# Altium PCB PCB1.PcbDoc
Units mil, origin at the board's own origin, x right, y up, seen from the top; angles counter-clockwise.
Board outline 2755.91 x 2854.33 mil, 2 copper layers (Top Layer, Bottom Layer); 77 components, 54 nets, 230 pads, 47 vias.
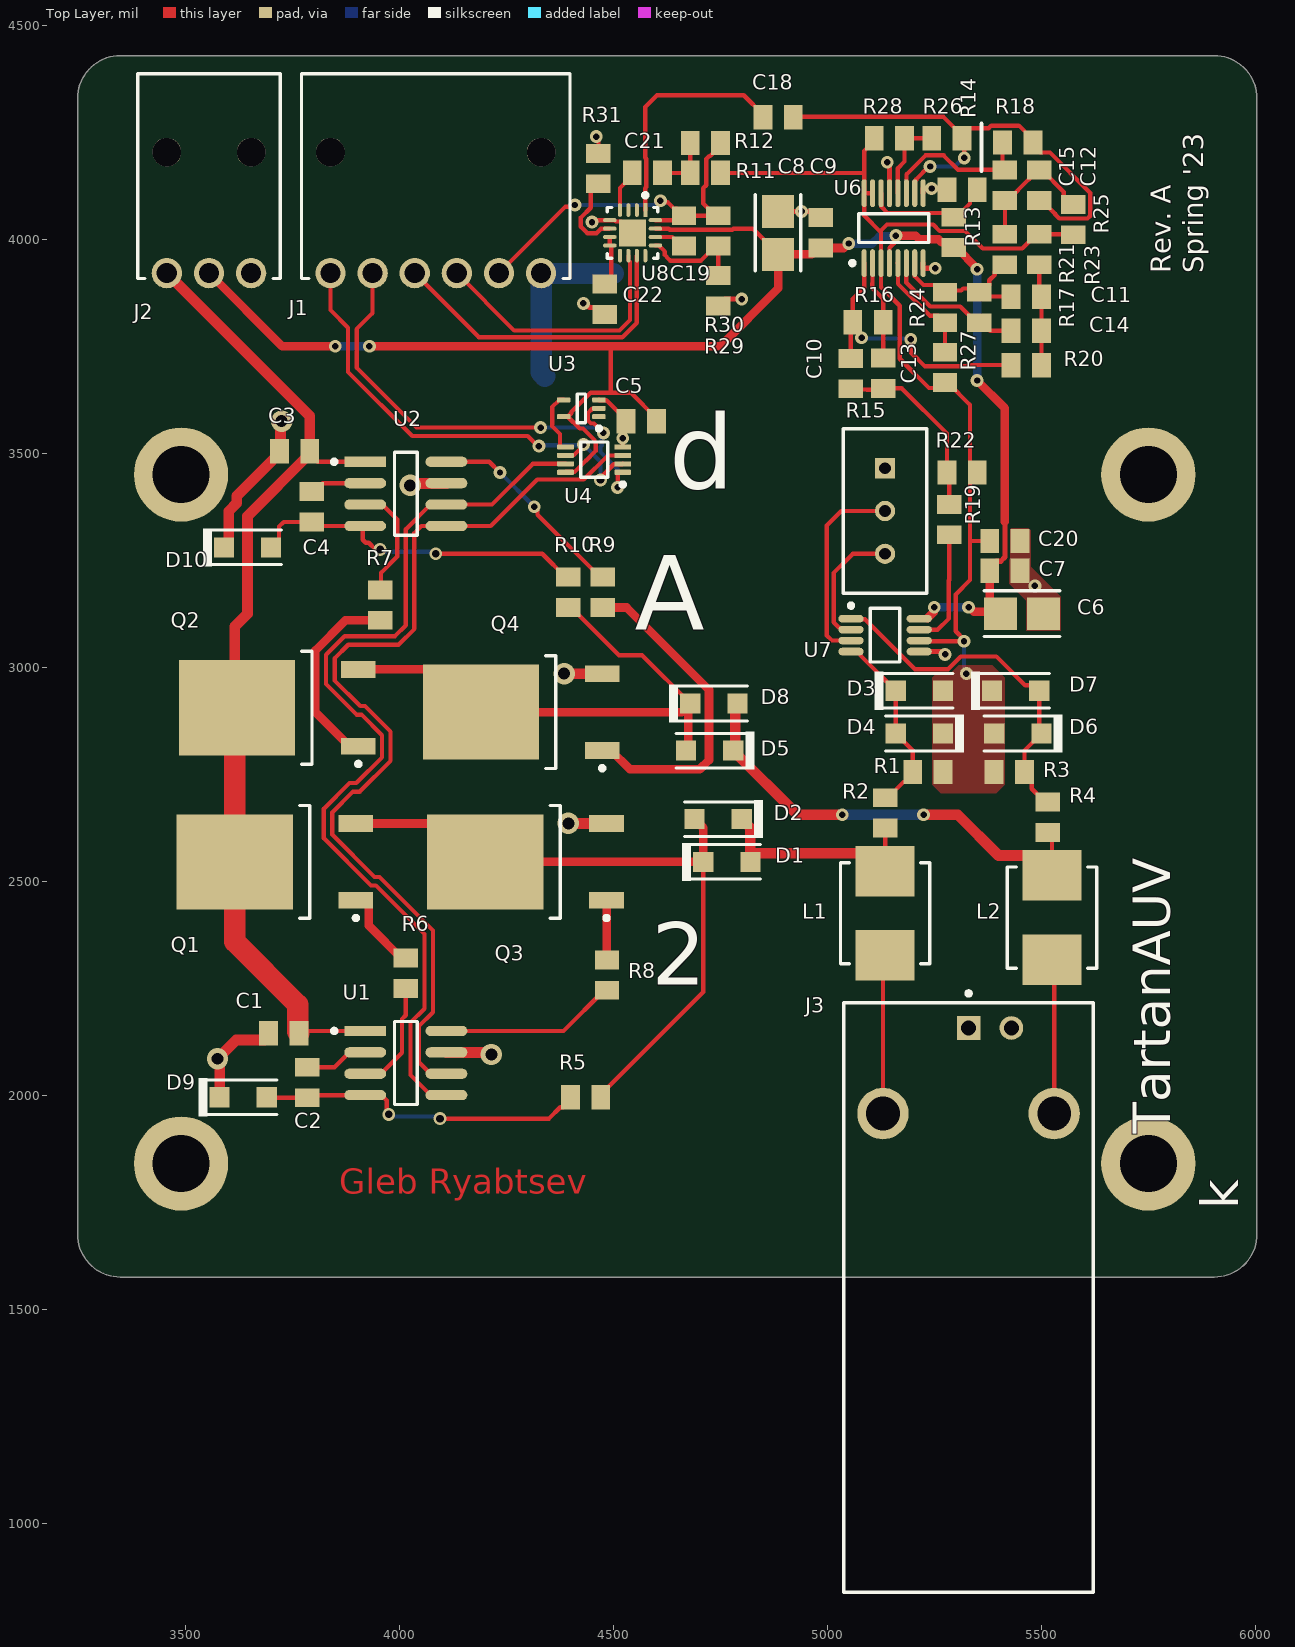
[diagram p0: Top Layer view]
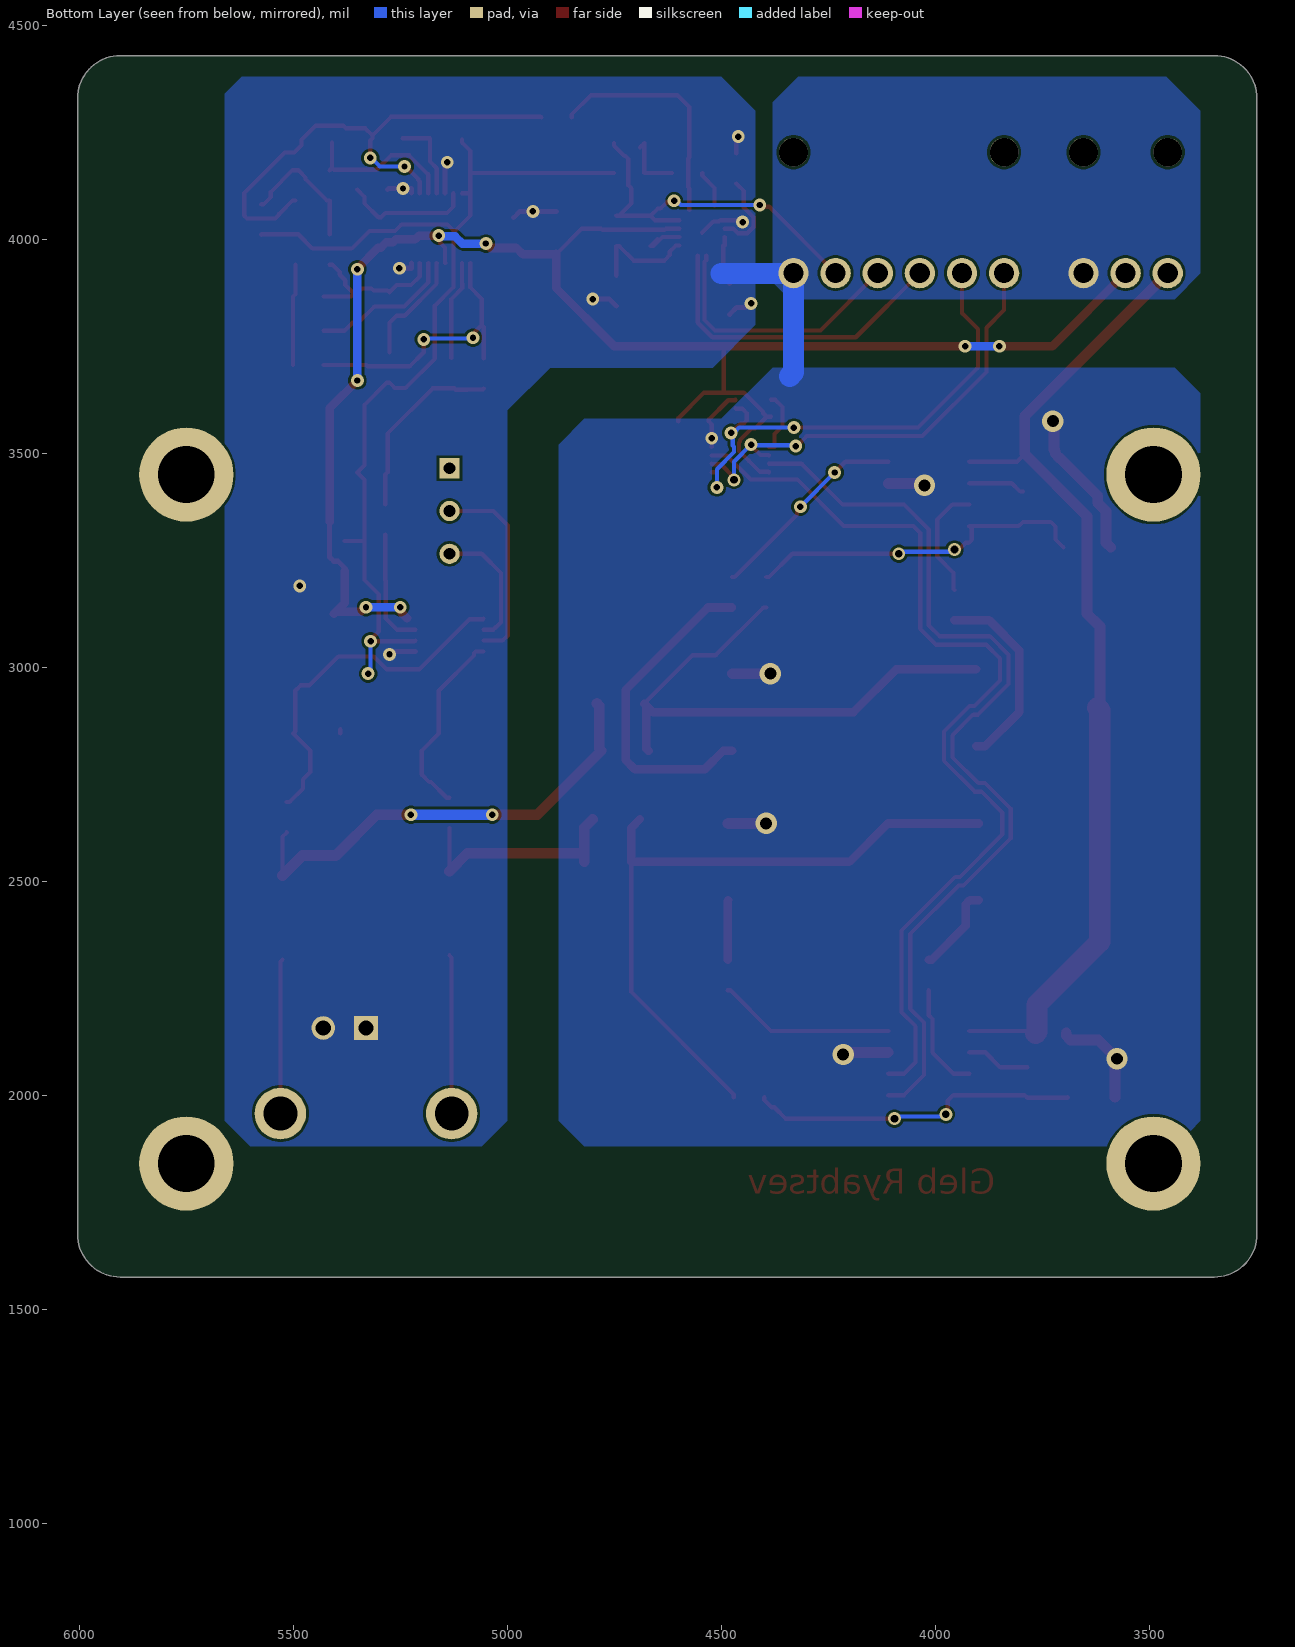
[diagram p1: Bottom Layer view, seen from below]

## Layer stack, top to bottom
Top Solder: solder mask 0.4, Solder Resist, Dk 3.5
Top Layer: signal copper 1.4
Dielectric 1: dielectric 12.6, FR-4, Dk 4.8
Bottom Layer: signal copper 1.4
Bottom Solder: solder mask 0.4, Solder Resist, Dk 3.5

## Board outline
3248.03,1674.8 ccw(c3348.03,1674.8) 3348.03,1574.8 5903.94,1574.8 ccw(c5903.94,1674.8) 6003.94,1674.8 6003.94,4329.13 ccw(c5903.94,4329.13) 5903.94,4429.13 3348.03,4429.13 ccw(c3348.03,4329.13) 3248.03,4329.13

## Design rules (kind name [scope] priority, off if disabled: settings)
Clearance [All] p1: gap=6 ignorepadtopadclearanceinfootprint=TRUE except(0: Arc-Text Arc-Hole Track-Text Track-Hole SMDPad-Text SMDPad-Hole THPad-Text THPad-Hole Via-Text Via-Hole Fill-Text Fill-Hole Poly-Text Poly-Hole Region-Text Region-Hole Text-Text Text-Hole; 5: Arc-Arc Arc-Track Arc-SMDPad Track-Track Track-SMDPad SMDPad-SMDPad)
HoleSize [All] p1: absolutevalues=TRUE maxlimit=244.09 minlimit=7.87 maxpercent=80.000 minpercent=20.000
MinimumAnnularRing [All] p1: minimumring=6
MinimumSolderMaskSliver [All] p1: minsoldermaskwidth=2.95
PolygonConnect [All] p1: connectstyle=Direct reliefconductorwidth=10 reliefentries=4 polygonreliefangle="90 Angle" airgapwidth=10
RoomDefinition Main [InComponentClass('Main')] p1: confinementstyle=ConfineIn formatcopy=TRUE lockcomponents=FALSE outline 1000,630 7090,630 7090,5020 1000,5020
RoomDefinition U_Tx [InComponentClass('U_Tx')] p2: confinementstyle=ConfineIn formatcopy=TRUE lockcomponents=FALSE outline 2230,620 7370,620 7370,4680 2230,4680
RoomDefinition U_Rx [InComponentClass('U_Rx')] p3: confinementstyle=ConfineIn formatcopy=TRUE lockcomponents=FALSE outline 1190,400 7600,400 7600,4620 1190,4620
RoutingVias [All] p1: holewidth=15 width=25 viastyle="Through Hole" minholewidth=12 minwidth=20 maxholewidth=28 maxwidth=50
SilkToSilkClearance [All] p1: silktosilkclearance=5
SilkToSolderMaskClearance [IsPad] p1: minsilkscreentomaskgap=5 clearancetoexposedcopper=TRUE
SolderMaskExpansion [All] p1: expansion=4 istentingtop=FALSE
Width [All] p1: maxlimit=50 minlimit=6 preferedwidth=10
26 further rules are at their usual default settings.

## Classes and differential pairs
component class U_Tx: C1 C2 C3 C4 C5 D9 D10 Q1 Q2 Q3 Q4 R5 R6 R7 R8 R9 R10 U1 U2 U3 U4
component class U_Rx: C6 C7 C8 C9 C10 C11 C12 C13 C14 C15 C18 C19 C20 C21 C22 R11 R12 R13 R14 R15 R16 R17 R18 R19 R20 R21 R22 R23 R24 R25 R26 R27 R28 R29 R30 R31 U6 U7 U8
component class Main: D1 D2 D3 D4 D5 D6 D7 D8 J1 J2 J3 L1 L2 R1 R2 R3 R4

## Components (designator, comment, footprint, x,y, rotation, side; value= is the part's Value field where it differs from the comment)
C1 "Capacitor" 0805 3729.5,2145 r0 top value=1u
C2 "Capacitor" 0805 3785,2029.5 r90 top value=1u
C3 "Capacitor" 0805 3755,3505 r0 top value=1u
C4 "Capacitor" 0805 3795,3375 r90 top value=1u
C5 "Capacitor" 0805 4565,3575 r0 top value=1u
C6 "C3216X5R1H106K160AB" FP-C3216-160-0_2-IPC_A 5455,3125 r0 top
C7 "Capacitor" 0805 5415,3225 r180 top value=0.1u
C8 "C3216X5R1H106K160AB" FP-C3216-160-0_2-IPC_A 4885,4015 r90 top
C9 "Capacitor" 0805 4985,4015 r270 top value=0.1u
C10 "Capacitor" 0805 5055,3686 r270 top value=330pF
C11 "Capacitor" 0805 5465,3866 r0 top value=300p
C12 "Capacitor" 0805 5495,4126 r90 top value=360p
C13 "Capacitor" 0805 5130.5,3687 r270 top value=330pF
C14 "Capacitor" 0805 5465,3786 r0 top value=300p
C15 "Capacitor" 0805 5415,4126 r270 top value=360p
C18 "Capacitor" 0805 4885,4285 r0 top value=19.6n
C19 "Capacitor" 0805 4665,4019.5 r90 top value=19.6n
C20 "Capacitor" 0805 5415,3295 r180 top value=0.1u
C21 "Capacitor" 0805 4579.5,4155 r0 top value=100n
C22 "Capacitor" 0805 4480,3860 r90 top value=100n
D1 "Diode" SOD-123F 4765,2545 r0 top
D2 "Diode" SOD-123F 4745,2645 r180 top
D3 "Diode" SOD-123F 5215,2945 r0 top
D4 "Diode" SOD-123F 5215,2845 r180 top
D5 "Diode" SOD-123F 4725,2805 r180 top
D6 "Diode" SOD-123F 5445,2845 r180 top
D7 "Diode" SOD-123F 5440.12,2945 r0 top
D8 "Diode" SOD-123F 4735,2915 r0 top
D9 "Diode" SOD-123F 3635,1995 r0 top
D10 "Diode" SOD-123F 3645.12,3280 r0 top
J1 "1053131106" "MOLEX 1053131106" 4085,4165 r0 top
J2 "1053131103" "MOLEX 1053131103" 3555,4165 r0 top
J3 "031-5540" FP-031-5540-MFG 5330,1526.97 r0 top
L1 "LQH55DN102M03L" FP-LQH55DN_03-MFG 5135,2425 r90 top
L2 "LQH55DN102M03L" FP-LQH55DN_03-MFG 5525,2415 r90 top
Q1 "IPD35N10S3L-26" INF-PG-TO252-3-11_M 3709.49,2545 r180 top
Q2 "IPD35N10S3L-26" INF-PG-TO252-3-11_M 3715,2905 r180 top
Q3 "IPD35N10S3L-26" INF-PG-TO252-3-11_M 4295,2545 r180 top
Q4 "IPD35N10S3L-26" INF-PG-TO252-3-11_M 4285,2895 r180 top
R1 "Resistor" 0805 5135,2659.5 r90 top value=100K
R2 "Resistor" 0805 5235,2755 r180 top value=1M
R3 "Resistor" 0805 5425,2755 r180 top value=1M
R4 "Resistor" 0805 5515,2649.5 r90 top value=100K
R5 "Resistor" 0805 4435,1995 r0 top value=3
R6 "Resistor" 0805 4015,2285 r90 top value=10
R7 "Resistor" 0805 3955,3145 r90 top value=10
R8 "Resistor" 0805 4485,2280.5 r90 top value=10
R9 "Resistor" 0805 4475,3175 r90 top value=10
R10 "Resistor" 0805 4395,3175 r270 top value=3
R11 "Resistor" 0805 4715,4155 r0 top value=0
R12 "Resistor" 0805 4715,4225 r0 top value=0
R13 "Resistor" 0805 5295,4016 r270 top value=10k
R14 "Resistor" 0805 5315,4116 r0 top value=10k
R15 "3296W-1-503LF" FP-3296W-MFG 5135,3365 r180 top
R16 "Resistor" 0805 5095,3806 r180 top value=95.3k
R17 "Resistor" 0805 5355,3840.5 r90 top value=97.6k
R18 "Resistor" 0805 5445,4226 r0 top value=95.3k
R19 "Resistor" 0805 5285,3345 r90 top value=48.7k
R20 "Resistor" 0805 5465,3706 r0 top value=48.7k
R21 "Resistor" 0805 5415,3976 r90 top value=48.7k
R22 "Resistor" 0805 5315,3455 r180 top value=986
R23 "Resistor" 0805 5495,3976 r270 top value=1K
R24 "Resistor" 0805 5275,3840.5 r90 top value=13.3k
R25 "Resistor" 0805 5575,4046 r90 top value=976
R26 "Resistor" 0805 5279.5,4236 r0 top value=14.3k
R27 "Resistor" 0805 5275,3700.5 r90 top value=133
R28 "Resistor" 0805 5145,4236 r0 top value=143
R29 "Resistor" 0805 4745,4019.5 r90 top value=10k
R30 "Resistor" 0805 4745,3879.5 r90 top value=10k
R31 "Resistor" 0805 4465,4165 r270 top value=10k
U1 "MIC4604YM-TR" FP-SOICN-8LD-PL-1-IPC_A 4015,2075 r0 top
U2 "MIC4604YM-TR" FP-SOICN-8LD-PL-1-IPC_A 4015,3405 r0 top
U3 "SN74AHC1G04DRLR" DRL0005A_M 4425,3605 r180 top
U4 "SN74LVC2G08DCUR" DCU0008A_M 4455,3485 r180 top
U6 "LTC6257CMS#PBF" LT-MS-16_N 5155,4026 r90 top value=48.7kR
U7 "AD8221ARMZ-R7" ADI-RM-8_L 5135,3075 r0 top
U8 "AD8338ACPZ-R7" FP-CP-16-22-IPC_C 4545,4015 r270 top value=48.7kR

## Footprints (in the part's own frame and the unit in brackets; to place one, negate y for a bottom-side part, rotate by r counter-clockwise, add the part's x,y. Pads: shape width x height; smd on the part's side, far side on the other; paste and mask are expansions set on the pad)
0805 [mil]
  rect 44x57 smd: 1(-35.5,0) 2(35.5,0)
  body extent 0,0 10,10, height 10
ADI-RM-8_L [mm] "SOP, 8-Leads, Body 3x3mm, Pitch 0.65mm, IPC High Density"
  oval 1.5x0.45 smd: 1(-2.025,0.975) 2(-2.025,0.325) 3(-2.025,-0.325) 4(-2.025,-0.975) 5(2.025,-0.975) 6(2.025,-0.325) 7(2.025,0.325) 8(2.025,0.975)
  silkscreen extent -2.15,-1.6 0.87,1.87, body extent -1.6,-1.6 1.6,1.6, height 1.1
DCU0008A_M [mm] "SOP, 8-Leads, Body 2.4x2.1mm, Pitch 0.5mm, IPC Low Density"
  rrect33% 1x0.3 smd: 1(-1.7,0.75) 2(-1.7,0.25) 3(-1.7,-0.25) 4(-1.7,-0.75) 5(1.7,-0.75) 6(1.7,-0.25) 7(1.7,0.25) 8(1.7,0.75)
  silkscreen extent -1.83,-1.05 0.8,1.6, body extent -1.56,-1 1.56,1, height 0.9
DRL0005A_M [mm] "SOT23, 5-Leads, Body 1.7x1.3mm, Pitch 0.5mm, IPC Low Density"
  rrect33% 0.8x0.3 smd: 1(-1.05,0.5) 2(-1.05,0) 3(-1.05,-0.5) 4(1.05,-0.5) 5(1.05,0.5)
  silkscreen extent -1.18,-0.85 0.25,1.32, body extent -0.65,-0.85 0.65,0.85, height 0.6
FP-031-5540-MFG [mm]
  rect 1.4x1.4 hole 0.9 paste-1000 mask+0: 1(0,16)
  round 1.4 hole 0.9 paste-1000 mask+0: 2(2.54,16)
  round 3.05 hole 2 paste-1000 mask+0: 3(-5.08,10.92) 4(5.08,10.92)
  silkscreen extent -7.4,-17.5 7.4,18.17, body extent -7.5,-17.6 7.5,17.6, height 0.25
FP-3296W-MFG [mm]
  rect 1.2x1.2 hole 0.7 paste-1000 mask+0: 1(0.005,-2.54)
  round 1.2 hole 0.7 paste-1000 mask+0: 2(0.005,0) 3(0.005,2.54)
  silkscreen extent -2.48,-4.89 2.48,4.89, body extent -2.58,-4.99 2.58,4.99, height 0.25
FP-C3216-160-0_2-IPC_A [mil]
  rect 76.93x75.05 smd paste+0 mask+0: 1(-50.24,0) 2(50.24,0)
  silkscreen extent -89,-53 89,53, body extent -108,-57 108,57, height 10
FP-CP-16-22-IPC_C [mm]
  rect 0.806x0.239 smd paste+0 mask+0: 1(-1.353,0.75)
  rrect100% 0.806x0.239 smd paste+0 mask+0: 2(-1.353,0.25) 3(-1.353,-0.25) 4(-1.353,-0.75) 9(1.353,-0.75) 10(1.353,-0.25) 11(1.353,0.25) 12(1.353,0.75)
  rrect100% 0.239x0.806 smd paste+0 mask+0: 5(-0.75,-1.353) 6(-0.25,-1.353) 7(0.25,-1.353) 8(0.75,-1.353) 13(0.75,1.353) 14(0.25,1.353) 15(-0.25,1.353) 16(-0.75,1.353)
  rect 1.6x1.6 smd paste-1000 mask+0: 17(0,0)
  silkscreen extent -2.36,-1.5 1.5,1.5, body extent -1.86,-1.86 1.86,1.86, height 0.25
FP-LQH55DN_03-MFG [mm]
  rect 3x3.5 smd paste+0 mask+0: 1(-2.5,0) 2(2.5,0)
  silkscreen extent -3,-2.65 3,2.65, body extent -4.1,-2.75 4.1,2.75, height 0.25
FP-SOICN-8LD-PL-1-IPC_A [mil]
  rect 97.79x23.89 smd paste+0 mask+0: 1(-94.92,75)
  rrect100% 97.79x23.89 smd paste+0 mask+0: 2(-94.92,25) 3(-94.92,-25) 4(-94.92,-75) 5(94.92,-75) 6(94.92,-25) 7(94.92,25) 8(94.92,75)
  silkscreen extent -172,-97 26,97, body extent -164,-117 164,117, height 10
INF-PG-TO252-3-11_M [mm] "DPAK, 3-Leads, Body 6.5x6.12mm, Pitch 2.28mm, IPC Low Density"
  rect 2.05x1 smd: 1(-4.8,2.28) 3(-4.8,-2.28)
  rect 6.9x5.65 smd: 2(2.4,0)
  silkscreen extent -4.93,-3.35 -1.45,3.45, body extent -2.05,-3.32 4.17,3.32, height 2.35
LT-MS-16_N [mm] "SOP, 16-Leads, Body 4.04x3.00mm, Pitch 0.50mm, IPC Medium Density"
  oval 1.65x0.3 smd: 1(-2.075,1.75) 2(-2.075,1.25) 3(-2.075,0.75) 4(-2.075,0.25) 5(-2.075,-0.25) 6(-2.075,-0.75) 7(-2.075,-1.25) 8(-2.075,-1.75) 9(2.075,-1.75) 10(2.075,-1.25) 11(2.075,-0.75) 12(2.075,-0.25) 13(2.075,0.25) 14(2.075,0.75) 15(2.075,1.25) 16(2.075,1.75)
  silkscreen extent -2.2,-2.08 0.85,2.57, body extent -1.55,-2.05 1.55,2.05, height 1.1
"MOLEX 1053131103" [mm] "Connector Header Through Hole, Right Angle 3 position, 2mm Pitch, 8.44x8.64 mm Body"
  round 1.8 hole 1.2: 1(-2.5,-6.2) 2(0,-6.2) 3(2.5,-6.2)
  round 1.7 hole 1.7: SH(-2.5,0.98) SH(2.5,0.98)
  silkscreen extent -4.22,-6.52 4.22,5.64, body extent -4.22,-6.52 4.22,5.64, height 6.64
"MOLEX 1053131106" [mm] "Connector Header Through Hole, Right Angle 6 position, 2mm Pitch, 15.94x8.64 mm Body"
  round 1.8 hole 1.2: 1(-6.25,-6.2) 2(-3.75,-6.2) 3(-1.25,-6.2) 4(1.25,-6.2) 5(3.75,-6.2) 6(6.25,-6.2)
  round 1.7 hole 1.7: SH(-6.25,0.98) SH(6.25,0.98)
  silkscreen extent -7.97,-6.52 7.97,5.64, body extent -7.97,-6.52 7.97,5.64, height 6.64
SOD-123F [mm]
  rect 1.2x1.2 smd paste-0.05 mask+0.051: 1(-1.4,0) 2(1.4,0)
  silkscreen extent -2.64,-1.12 2.01,1.12, body extent 0,0 0.25,0.25, height 0.25

## Part data
C6 C8: library part CMP-2000-06045-2, "Multilayer Ceramic Capacitors 10uF ±10% 50V X5R SMD 1206", Capacitance=10uF, Case Code (Imperial)=1206, Case Code (Metric)=3216, Dielectric=X5R, Dielectric Material=Ceramic, Max Operating Temperature=85°C, Min Operating Temperature=-55°C, Package Quantity=1, Tolerance=10%, Voltage=50V, Case/Package=1206, Construction=Flat, Depth=1.6mm, Height=1.6mm, Lead Free="Lead Free", Length=3.2mm, Mount="Surface Mount", Packaging="Tape and Reel", Radiation Hardening=No, REACH SVHC="No SVHC", Resistor Type=Ceramic, RoHS Compliant=Yes, Series=C, Termination=SMD/SMT, Thickness=0.071inch, Voltage Rating=50V, Voltage Rating (DC)=50V, Weight=0.000571oz, Width=0.063inch
J1: "CONN HEADER R/A 6POS 2.5MM", Insulation Color=Black, Manufacturer=Molex, Operating Temperature="-40°C ~ 105°C", Supplier Part Number 1=WM16897-ND, ComponentLink1Description=Datasheet, ComponentLink1URL=https://www.molex.com/pdm_docs/ps/PS-105300-100-001.pdf, ComponentLink2Description="DigiKey Link", ComponentLink2URL=https://www.digikey.com/en/products/detail/molex/1053131106/7693178, Connector Type=Header, Contact Finish - Mating=Tin, Contact Finish - Post=Tin, Contact Finish Thickness - Mating="59.0µin (1.50µm)", Contact Length - Post="0.126\" (3.20mm)", Contact Material=Brass, Contact Shape=Square, Contact Type="Male Pin", Fastening Type="Latch Holder", Features="Board Guide", Insulation Height="0.149\" (3.78mm)", Insulation Material="Liquid Crystal Polymer (LCP)", LastUpdated="8/11/2022 9:49:49 AM", Lifecycle Status=Active, Minimum Order=1, Mounting Type="Through Hole, Right Angle", Number of Positions=6, Number of Positions Loaded=All, Number of Rows=1, Packaging=Tray, Part Number=1053131106, Part Status=Active, PartId=145, Pitch - Mating="0.098\" (2.50mm)", Price=0.75, Row Spacing - Mating="-40°C ~ 105°C", Series="Nano-Fit 105313", Shrouding="Shrouded - 4 Wall", Style="Board to Cable/Wire", Supplier 1=DigiKey, Termination=Solder
J2: "CONN HEADER R/A 3POS 2.5MM", Insulation Color=Black, Manufacturer=Molex, Operating Temperature="-40°C ~ 105°C", Supplier Part Number 1=WM16894-ND, ComponentLink1Description=Datasheet, ComponentLink1URL=http://www.literature.molex.com/SQLImages/kelmscott/Molex/PDF_Images/987651-1223.PDF, ComponentLink2Description="DigiKey Link", ComponentLink2URL=http://digikey.com/product-detail/en/molex/1053131103/WM16894-ND/7693175, Connector Type=Header, Contact Finish - Mating=Tin, Contact Finish - Post=Tin, Contact Finish Thickness - Mating="59.0µin (1.50µm)", Contact Length - Post="0.126\" (3.20mm)", Contact Material=Brass, Contact Shape=Square, Contact Type="Male Pin", Fastening Type="Latch Holder", Features="Board Guide", Insulation Height="0.149\" (3.78mm)", Insulation Material="Liquid Crystal Polymer (LCP)", LastUpdated="8/11/2022 9:48:02 AM", Lifecycle Status=Active, Minimum Order=1, Mounting Type="Through Hole, Right Angle", Number of Positions=3, Number of Positions Loaded=All, Number of Rows=1, Packaging=Tray, Part Number=1053131103, Part Status=Active, PartId=142, Pitch - Mating="0.098\" (2.50mm)", Price=0.95, Row Spacing - Mating="-40°C ~ 105°C", Series="Nano-Fit 105313", Shrouding="Shrouded - 4 Wall", Style="Board to Cable/Wire", Supplier 1=DigiKey, Termination=Solder
J3: library part CMP-20040-000002-1, "CONN BNC RCPT R/A 50 OHM PCB", Dielectric Material=Polypropylene, Frequency=1GHz, Manufacturer="Amphenol RF", Package=0, Temperature="-55°C to +85°C", Temperature Range High=+85°C, Temperature Range Low=-55°C, Automotive=No, Category=Conn, ComponentLink2Description=Datasheet, ComponentLink2URL=https://www.amphenolrf.com/downloads/dl/file/id/2040/product/579/031_5540_customer_drawing.pdf, Conn Orientation="Right Angle", Contact Material=Gold,Nickel, Device Class L1=Connectors, Device Class L2="RF / Coaxial Connectors", Device Class L3=unset, Digikey Description="CONN BNC RCPT R/A 50 OHM PCB", Height=13.4mm, Impedance=50Ω, Is Female=yes, Lead Free=Yes, Manufacturer Part Number=031-5540, Number Of Contacts=2, Octopart=https://octopart.com/031-5540-amphenol+rf-49742301, Pitch=2.54mm, RoHS=TRUE
L1 L2: library part CMP-06042-004467-1, "Wire Wound Ferrite Inductor for Power Lines 1000μH ±20% 14.42Ω  0.15A 2220", Case Code (Imperial)=2220, Case Code (Metric)=5750, Current Rating=150mA, DC Resistance (DCR)=10.3R, Inductance=1mH, Max Operating Temperature=80°C, Min Operating Temperature=-40°C, Package Quantity=350, Resistor Type=Wirewound, Self Resonant Frequency=1.7MHz, Test Frequency=10kHz, Tolerance=20%, Case/Package=2220, Core Material=Ferrite, DC Current=150mA, Depth=5.3mm, Height=0.197inch, Height - Seated (Max)=0.198inch, Lead Free="Lead Free", Length=0.224inch, Max DC Current=150mA, Military Standard=Not, Mount="Surface Mount", Packaging="Tape and Reel", Radiation Hardening=No, Series Resistance=10.3R, Shielding=Unshielded, Termination=SMD/SMT, Weight=0.016932oz, Width=0.197inch
Q1 Q2 Q3 Q4: library part CMP-1138-00144-1, "OptiMOS-T Power-Transistor, 100 V VDS, 35 A ID, PG-TO252-3-11, Reel, Green", Manufacturer=Infineon, ComponentLink1Description="Manufacturer URL", ComponentLink1URL=http://www.infineon.com/, ComponentLink2Description=Datasheet, ComponentLink2URL=http://www.infineon.com/dgdl/IPD35N10S3L-26_DS_1_1.pdf?folderId=db3a3043156fd5730115c7d50620107c&fileId=db3a30431a5c32f2011a9085629c594b&location=en.Products.Automotive_ICs.Automotive_MOSFETs.Single__N-Channel_100V_MOSFETs.DATASHEET.IPD35N10S3L-26_DS_1_1.p, ComponentLink3Description="Package Specification", ComponentLink3URL=http://www.infineon.com/dgdl/BTS142_DS_13.pdf?folderId=db3a3043163797a6011667aa084c0e01&fileId=db3a3043163797a6011667ac98be0e02&location=en.Products.Automotive_ICs.Smart_High-_and_Low-Side_Switches.HITFET___TEMPFET__-_Smart_Low-Side_Switches.DATASHEET.BTS1, DatasheetVersion=Rev.1.1, Green=TRUE, Halogen-free=TRUE, ID (max)="35 A", IDpuls (max)="140 A", Mounting Technology="Surface Mount", PackageDescription="3-Pin Plastic (Green) Transistor Single Outline Package, 6.5 x 6.12 mm Body, 2.28 mm Pitch", PackageReference=PG-TO252-3-11, PackageVersion=Dec-06, Packing=Reel, PartNumber=IPD35N10S3L-26, Ptot (max)="71 W", QG="39 nC", RDS (on) (max) (@4.5V)="31.9 mOhm", RDS (on) (max) (@10V)="24 mOhm", RthJC (max)="2.1 K/W", Technology=OptiMOS-T, VDS (max)="100 V", VGS(th) (max)="2.4 V", VGS(th) (min)="1.2 V"
R15: library part CMP-07234-000043-1, "TRIMMER 50K OHM 0.5W PC PIN TOP", Color=Blue, Insulation Resistance=1GR, Manufacturer Series=3296, Max Operating Temperature=125°C, Max Power Dissipation=500mW, Min Operating Temperature=-55°C, Package Quantity=50, Resistance=50kR, Resistance Law=Linear, Resistance Tolerance=10%, Resistor Type=Cermet, Temperature Coefficient=100ppm/°C, Actuator Orientation=Vertical, Actuator Type=SCREW, Contact Plating=Tin, Depth=4.83mm, Height=0.395inch, Lead Free="Lead Free", Length=9.53mm, Military Standard=Not, Mount=Panel, Number of Pins=3, Number of Terminals/Pins=3, Number of Turns=25, Packaging=Rail/Tube, Power Rating=500mW, Radiation Hardening=No, REACH SVHC="No SVHC", RoHS Compliant=Yes, Series=3296, Taper=Linear, Technology=CERMET, Terminal Finish=Tin, Termination=Pin, Tolerance=10%, Type=Potentiometer, Weight=0.03oz, Width=9.53mm
R19 R20: "Fixed Resistor, Metal Glaze/thick Film, 0.125W, 48700ohm, 150V, 1% +/-Tol, 100ppm/Cel, Surface Mount, 0805", Case/Package=0805, Manufacturer=Panasonic, Manufacturer Part Number=ERJ-6ENF4872V, Max Operating Temperature=155°C, Min Operating Temperature=-55°C, Package Height=0.6mm, Package Length=2mm, Package Shape=Rectangular, Package Style=SMTMeter, Package Width=1.25mm, Power=125mW, Rated Temperature=70°C, Resistor Type="FIXED RESISTOR", Supplier Part Number=667-ERJ-6ENF4872V, Temperature Coefficient=100ppm/°C, Tolerance=1%, Working Voltage=150V, Category="Chip SMD Resistors", ComponentLink1Description=https://datasheet.ciiva.com:443/pdfs/VipMasterIC/IC/PANA/PANA-S-A0009889626/PANA-S-A0009889626-1.pdf?src-supplier=IHS+Markit, ComponentLink1URL=https://datasheet.ciiva.com:443/pdfs/VipMasterIC/IC/PANA/PANA-S-A0009889626/PANA-S-A0009889626-1.pdf?src-supplier=IHS+Markit, ComponentLink2Description=https://datasheet.ciiva.com/9189/aoa0000ce2-9189241.pdf?src-supplier=Avnet, ComponentLink2URL=https://datasheet.ciiva.com/9189/aoa0000ce2-9189241.pdf?src-supplier=Avnet, ComponentLink3Description=https://datasheet.ciiva.com/46420/1678782-46420077.pdf?src-supplier=Element14, ComponentLink3URL=https://datasheet.ciiva.com/46420/1678782-46420077.pdf?src-supplier=Element14, ComponentLink4Description=https://datasheet.ciiva.com/22668/1678782-22668698.pdf?src-supplier=Element14, ComponentLink4URL=https://datasheet.ciiva.com/22668/1678782-22668698.pdf?src-supplier=Element14, ComponentLink5Description=https://datasheet.ciiva.com/24063/aoa0000ce2-24063086.pdf?src-supplier=Mouser, ComponentLink5URL=https://datasheet.ciiva.com/24063/aoa0000ce2-24063086.pdf?src-supplier=Mouser, Construction=Rectangular, JESD-609 Code=e3, Mounting Technology="Surface Mount", Packaging="Tape and Reel", Pins=2, Pricing="1=0.11000, 10=0.08900, 50=0.08900, 100=0.03500, 1000=0.01600, 10000=0.01100 (USD)", Reach SVHC Compliant=Yes, Reference Standard=AEC-Q200, RoHS=Yes, RoHS Compliant=Yes, SimulationGenericComponent=True, Stock=62583, Supplier=Mouser, TC1=0, TC2=0, Technology="METAL GLAZE/THICK FILM", Terminal Finish=Nickel, Termination=Wraparound
U1 U2: library part CMP-06319-000039-1, "IC GATE DRVR HALF-BRIDGE 8SOIC", Case/Package=SOIC, Max Operating Temperature=125°C, Max Output Current=1A, Max Supply Voltage=16V, Min Operating Temperature=-40°C, Min Supply Voltage=5.5V, Nominal Supply Current=48uA, Operating Supply Voltage=12V, Package Quantity=2500, Channel Type=Independent, Fall Time=20ns, Lead Free="Lead Free", Mount="Surface Mount", Number of Drivers=2, Number of Outputs=1, Number of Pins=8, Packaging="Tape and Reel", Rise Time=20ns, RoHS Compliant=Yes, Series=-, Supply Current=48uA, Turn-Off Delay Time=75ns, Turn-On Delay Time=75ns
U3: library part CMP-0859-00797-3, "Single Inverter Gate, DRL0005A, LARGE T&R", F @ Nom Voltage(Max)(Mhz)=75, Generic Part Number=SN74AHC1G04, ICC @ Nom Voltage(Max)(mA)=0.01, Manufacturer="Texas Instruments", Operating Temperature Range(C)="-40 to 125", Rating=Catalog, tpd @ Nom Voltage(Max)(ns)=10.6,7.5, Voltage(Nom)(V)=3.3,5, 3-State Output=No, Bits(#)=1, DatasheetVersion=SCLS318S, Input Type=CMOS, Logic=Inverting, Output Drive (IOL/IOH)(Max)(mA)=50/-50, Output Type=CMOS, PackageReference=DRL0005A, Schmitt Trigger=No, Sub-Family="Inverting Buffer/Driver", Technology Family=AHC, VCC(Max)(V)=5.5, VCC(Min)(V)=2
U4: library part CMP-0859-00670-3, "Dual 2-Input Positive-AND Gate, DCU0008A, LARGE T&R", F @ Nom Voltage(Max)(Mhz)=150, Generic Part Number=SN74LVC2G08, ICC @ Nom Voltage(Max)(mA)=0.01, Manufacturer="Texas Instruments", Operating Temperature Range(C)="-40 to 125,-40 to 85", Rating=Catalog, tpd @ Nom Voltage(Max)(ns)=9.8,5.8,5.3,4.8, Voltage(Nom)(V)=1.8,2.5,3.3,5, 3-State Output=No, Bits(#)=2, DatasheetVersion=SCES198M, Gate Type=AND, Input Type=CMOS/TTL, Logic=True, Output Drive (IOL/IOH)(Max)(mA)=32/-32, Output Type=CMOS, PackageReference=DCU0008A, Schmitt Trigger=No, Sub-Family="AND Gate", Technology Family=LVC, VCC(Max)(V)=5.5, VCC(Min)(V)=1.65
U6: library part CMP-0359-00487-2, "Quad Channel, Power Efficient Operational Amplifier, RRIO, 6.5 MHz Typical GBW, 1.8 V/us Typical SR, 1.8 to 5.25 V, 16-Pin SOP (MS16), Commercial, Pb-Free", Case/Package=0805, Linear Technology Part Number=LTC6257, Manufacturer="Linear Technology", Manufacturer Part Number=ERJ-6ENF4872V, Max Operating Temperature=155°C, Min Operating Temperature=-55°C, Package Height=0.6mm, Package Length=2mm, Package Shape=Rectangular, Package Style=SMTMeter, Package Width=1.25mm, Power=125mW, Rated Temperature=70°C, Resistor Type="FIXED RESISTOR", Supplier Part Number=667-ERJ-6ENF4872V, Temperature Coefficient=100ppm/°C, Tolerance=1%, Working Voltage=150V, Category="Chip SMD Resistors", Channels (#)=4, ComponentLink1Description="Manufacturer URL", ComponentLink1URL=http://www.linear.com/, ComponentLink2Description=Datasheet, ComponentLink2URL=http://cds.linear.com/docs/en/datasheet/625567fb.pdf, ComponentLink3Description="Package Specification", ComponentLink3URL=http://cds.linear.com/docs/en/packaging/MSOP_16_05-08-1669.pdf, ComponentLink4Description=https://datasheet.ciiva.com:443/pdfs/VipMasterIC/IC/PANA/PANA-S-A0009889626/PANA-S-A0009889626-1.pdf?src-supplier=IHS+Markit, ComponentLink4URL=https://datasheet.ciiva.com:443/pdfs/VipMasterIC/IC/PANA/PANA-S-A0009889626/PANA-S-A0009889626-1.pdf?src-supplier=IHS+Markit, ComponentLink5Description=https://datasheet.ciiva.com/9189/aoa0000ce2-9189241.pdf?src-supplier=Avnet, ComponentLink5URL=https://datasheet.ciiva.com/9189/aoa0000ce2-9189241.pdf?src-supplier=Avnet, ComponentLink6Description=https://datasheet.ciiva.com/46420/1678782-46420077.pdf?src-supplier=Element14, ComponentLink6URL=https://datasheet.ciiva.com/46420/1678782-46420077.pdf?src-supplier=Element14, ComponentLink7Description=https://datasheet.ciiva.com/22668/1678782-22668698.pdf?src-supplier=Element14, ComponentLink7URL=https://datasheet.ciiva.com/22668/1678782-22668698.pdf?src-supplier=Element14, ComponentLink8Description=https://datasheet.ciiva.com/24063/aoa0000ce2-24063086.pdf?src-supplier=Mouser, ComponentLink8URL=https://datasheet.ciiva.com/24063/aoa0000ce2-24063086.pdf?src-supplier=Mouser, Construction=Rectangular, DatasheetVersion="Rev. B", GBW (MHz) Typical=6.5, Is (mA) Typical=0.065, JESD-609 Code=e3, Mounting Technology="Surface Mount", PackageDescription="16-Lead Plastic MSOP, Body 4.04 x 3.00 mm, Pitch 0.50 mm", PackageReference=LT-MS-16, PackageVersion="Rev Ã˜", Packaging="Tape and Reel", PartNumber=LTC6257CMS#PBF, Pins=2, Pricing="1=0.11000, 10=0.08900, 50=0.08900, 100=0.03500, 1000=0.01600, 10000=0.01100 (USD)", Reach SVHC Compliant=Yes, Reference Standard=AEC-Q200, RevisionNote="URLs updated", RoHS=Pb-Free, RoHS Compliant=Yes, SR (V/us) Typical=1.8, Stock=62583, Supplier=Mouser, Technology="METAL GLAZE/THICK FILM", Terminal Finish=Nickel, Termination=Wraparound, Type=VFB, Vos (mV) Typical=0.1, Vs Max (V)=5.25, Vs Min (V)=1.8
U7: library part CMP-0934-00067-1, "Precision Instrumentation Amplifier, 2 V/us, -40 to 125 degC, 8-Pin MSOP (RM-8), RoHS, Tape and Reel", Manufacturer="Analog Devices", Quiescent Current="0.9 mA Typ.", Temperature Range="-40 to 125 degC", -3dB Bandwidth@G="1=825 kHz", ComponentLink1Description="Manufacturer URL", ComponentLink1URL=http://www.analog.com/en/index.html, ComponentLink2Description=Datasheet, ComponentLink2URL=http://www.analog.com/static/imported-files/data_sheets/AD8221.pdf, ComponentLink3Description="Package Specification", ComponentLink3URL=http://www.analog.com/static/imported-files/packages/PKG_PDF/MSOP(RM)/RM_8.pdf, DatasheetVersion="Rev. C", Mounting Technology="Surface Mount", PackageDescription="8-Pin Mini Small Outline Package, Body 3 x 3 mm, Pitch 0.65 mm", PackageVersion=Aug-05, Packing="Tape and Reel", PartNumber=AD8221ARMZ-R7, RoHS=TRUE, Slew Rate@G="1=2 V/us Typ.", VIO="60 uV Max."
U8: library part CMP-09116-000032-1, "IC OPAMP VGA 1 CIRCUIT 16LFCSP", Case/Package=0805, Manufacturer="Analog Devices", Max Junction Temp=+150°C, Max Operating Temperature=155°C, Max Supply Voltage=5V, Min Operating Temperature=-55°C, Min Supply Voltage=3V, Nominal Supply Current=3-6mA, Output Current Per Channel=5mA, Package=CP-16-22, Package Height=0.6mm, Package Length=2mm, Package Shape=Rectangular, Package Style=SMTMeter, Package Width=1.25mm, Power=125mW, Rated Temperature=70°C, Resistor Type="FIXED RESISTOR", Supplier Part Number=667-ERJ-6ENF4872V, Temperature="-40°C to +85°C", Temperature Coefficient=100ppm/°C, Temperature Range High=+85°C, Temperature Range Low=-40°C, Tolerance=1%, Voltage Gain=80dB, Working Voltage=150V, Automotive=No, Bandwidth=18MHz, Category=IC, ComponentLink1Description=https://datasheet.ciiva.com:443/pdfs/VipMasterIC/IC/PANA/PANA-S-A0009889626/PANA-S-A0009889626-1.pdf?src-supplier=IHS+Markit, ComponentLink1URL=https://datasheet.ciiva.com:443/pdfs/VipMasterIC/IC/PANA/PANA-S-A0009889626/PANA-S-A0009889626-1.pdf?src-supplier=IHS+Markit, ComponentLink2Description=Datasheet, ComponentLink2URL=https://www.analog.com/media/en/technical-documentation/data-sheets/AD8338.pdf, ComponentLink3Description=https://datasheet.ciiva.com/9189/aoa0000ce2-9189241.pdf?src-supplier=Avnet, ComponentLink3URL=https://datasheet.ciiva.com/9189/aoa0000ce2-9189241.pdf?src-supplier=Avnet, ComponentLink4Description=https://datasheet.ciiva.com/46420/1678782-46420077.pdf?src-supplier=Element14, ComponentLink4URL=https://datasheet.ciiva.com/46420/1678782-46420077.pdf?src-supplier=Element14, ComponentLink5Description=https://datasheet.ciiva.com/22668/1678782-22668698.pdf?src-supplier=Element14, ComponentLink5URL=https://datasheet.ciiva.com/22668/1678782-22668698.pdf?src-supplier=Element14, ComponentLink6Description=https://datasheet.ciiva.com/24063/aoa0000ce2-24063086.pdf?src-supplier=Mouser, ComponentLink6URL=https://datasheet.ciiva.com/24063/aoa0000ce2-24063086.pdf?src-supplier=Mouser, Construction=Rectangular, Device Class L1="Integrated Circuits (ICs)", Device Class L2="Linear ICs", Device Class L3="Amplifiers - Op Amps", Digikey Description="IC OPAMP VGA 1 CIRCUIT 16LFCSP", Height=0.8mm, Ipc Land Pattern Name=QFN50P300X300X75-16, JESD-609 Code=e3, Lead Free=Yes, Manufacturer Part Number=AD8338ACPZ-R7, Mounting Technology="Surface Mount", Mouser Description="Special Purpose Amplifiers Ultra Low Pwr 18MHz SGL CH VGA", Number Of Channels=1, Octopart=https://octopart.com/ad8338acpz-r7-analog+devices-21054770, Packaging="Tape and Reel", Pins=2, Pricing="1=0.11000, 10=0.08900, 50=0.08900, 100=0.03500, 1000=0.01600, 10000=0.01100 (USD)", Reach SVHC Compliant=Yes, Reference Standard=AEC-Q200, RoHS=TRUE, RoHS Compliant=Yes, Stock=62583, Supplier=Mouser, Technology="METAL GLAZE/THICK FILM", Terminal Finish=Nickel, Termination=Wraparound
C1 C2 C3 C4 C5 C7 C9 C10 C11 C12 C13 C14 C15 C18 C19 C20 C21 C22: SimulationGenericComponent=True
D1 D2 D3 D4 D5 D6 D7 D8 D9 D10: AF=1, BV=0, BV_MAX=1e99, CJO=0, CJP=0, CTA=0, CTP=0, EG=1.11, FC=0.5, FCS=0.5, FV_MAX=1e99, IBV=0.001, IKF=0, IKR=0, IS=1e-14, ISR=1e-14, JSW=0, JTUN=0, JTUNSW=0, KEG=1, KF=0, LEVEL=1, MJSW=0.33, N=1, NBV=1, NR=1, NS=1, NTUN=30, PHP=1, RS=0, SimulationGenericComponent=True, TCV=0, TLEV=0, TLEVC=0, TM1=0, TM2=0, TNOM=27, TPB=0, TPHP=0, TRS=0, TRS2=0, TT=0, TTT1=0, TTT2=0, VJ=1, XTI=3, XTITUN=3
R1 R2 R3 R4 R5 R6 R7 R8 R9 R10 R11 R12 R13 R14 R16 R17 R18 R21 R22 R23 R24 R25 R26 R27 R28 R29 R30 R31: SimulationGenericComponent=True, TC1=0, TC2=0

## Free pads (board coordinates)
  round 220 hole 133: 3(3490,1840) 3(3490,3450) 3(5750,1840) 3(5750,3450)

## Via types
v1: diameter 30, hole 15, Top Layer to Bottom Layer, 36 vias
v2: diameter 50, hole 28, Top Layer to Bottom Layer, 6 vias
v3: diameter 30, hole 18, Top Layer to Bottom Layer, 5 vias

## Nets (pads, with @x,y where several pads share a name; then routed paths per layer and width w, separated by ;. In a path a pad name is that pad's centre, name@x,y a point inside that pad or via, vN(x,y) a via of type N, cw(c..) or ccw(c..) an arc to the next point about the centre after c; other vN are vias at no path point)
AD8338_VREF: C19.2 J1.5 R12.2 R29.2 U8.16 | length 868
  Top Layer w10: J1.5 4387.91,4076.17 4406.17,4076.17 v1(4410,4080) ; U8.16 4654.53,4044.53 C19.2 ; v1(4610,4090) 4613.83,4086.17 4627.33,4086.17 4641.5,4072 4648,4072 C19.2 ; R29.2 R29.2@4738.5,4055 ; R12.2 4750.5,4218.5 4726.5,4194.5 4723.94,4194.5 4716.94,4187.49 4716.94,4126.38 4710,4119.44 4710,4083.5 R29.2@4738.5,4055 ; C19.2 R29.2@4738.5,4055
  Bottom Layer w10: v1(4410,4080) 4594.59,4080 4604.59,4090 v1(4610,4090)
BANDPASS_OUT: C12.1 C18.2 R18.2 R26.2 U6.10 | length 1210
  Top Layer w10: C18.2 4921.5,4286 5271.5,4286 R26.2@5315,4242.5 ; U6.10 5204.21,4134.76 5207.99,4138.54 5207.99,4140.86 5237.14,4170 v1(5240,4170) ; v1(5320,4190) 5320,4231 R26.2 R26.2@5315,4242.5 ; C12.1 5501.5,4090.5 5532.64,4059.36 5532.64,4057.8 5541.94,4048.5 5608.06,4048.5 5614.5,4054.94 5614.5,4108.06 5520.06,4202.5 5497.5,4202.5 5480.5,4219.5 R18.2 5480.5,4232.5 5447.5,4265.5 5382.94,4265.5 5376.94,4259.5 5332,4259.5 R26.2@5315,4242.5
  Bottom Layer w10: v1(5240,4170) 5297.57,4170 5317.57,4190 v1(5320,4190)
GND: C1.1 C3.1 C5.1 C6.2 C7.1 C8.2 C9.1 C20.1 C22.1 D9.1 D10.1 J1.6 J2.3 J3.1 J3.2 Q3.3 Q4.3 R14.1 R30.1 R31.1 U1.7 U2.7 U3.3 U4.4 U6.8 U6.9 U6.13 U7.5 U8.5 U8.17 | length 2150.9
  Top Layer w10: v1(4450,4040) 4454.06,4040 4458.59,4044.53 U8.5 4502.31,4044.53 4505.34,4041.5 4518.5,4041.5 U8.17 ; v1(4460,4240) 4465,4235 R31.1 ; U3.3 4467.24,3623.78 4483.63,3623.78 4529.5,3577.91 C5.1 4521.93,3567.43 v1(4521.93,3535) U4.4
  Top Layer w12: v1(4430,3850) 4434.87,3850 4444.37,3840.5 4464,3840.5 C22.1 ; R30.1 4761,3860 v1(4800,3860) ; C8.2 v1(4940,4065.24) 4970.26,4065.24 C9.1 ; v1(5140,4180) 5140,4175.13 5145.16,4169.97 U6.13 ; U7.5 5268.52,3036.61 v1(5275.13,3030) ; U6.8 5223.9,3932.18 5223.99,3932.08 v1(5252.11,3932.08) ; U6.9 5223.9,4118.45 5223.99,4118.55 5276.95,4118.55 R14.1
  Top Layer w25: D9.1 3579.88,2080.12 v2(3575,2085) 3619,2129 3684.5,2129 3694,2138.5 C1.1 ; D10.1 3601,3291 3601,3364.63 3620,3383.62 3620,3400 3709,3489 3710,3489 3719.5,3498.5 C3.1 3722.25,3507.75 3722.25,3572.25 v2(3725,3575) ; v2(4025,3425) 4029.45,3429.45 4109.37,3429.45 U2.7 ; U1.7 4110.48,2099.45 4210.55,2099.45 v2(4215,2095) ; v2(4385,2985) 4385.12,2984.88 4473.86,2984.88 Q4.3 ; v2(4395,2635) 4395.12,2634.88 4483.86,2634.88 Q3.3
  Bottom Layer w50: 4340,3680 4331.06,3688.94 J1.6 4331.97,3920 4500,3920
  other v1: 5485,3190 5243.55,4118.55
NetC2_1: C2.1 D9.2 R5.1 U1.4 | length 775.9
  Top Layer w10: D9.2 3691.12,1994 C2.1 3791,2000 U1.4 3957.82,2000 3970.63,1987.2 3970.63,1959.37 v3(3975,1955) ; v3(4095,1945) 4349.5,1945 4376,1971.5 4382.5,1971.5 4399.5,1988.5 R5.1
  Bottom Layer w10: v3(3975,1955) 3980,1950 4090,1950 v3(4095,1945)
NetC2_2: C2.2 U1.2 | length 149.6
  Top Layer w10: C2.2 3848.13,2065 3883.13,2100 U1.2
NetC4_1: C4.1 D10.2 R10.1 U2.4 | length 817.6
  Top Layer w10: D10.2 3718.86,3298.62 3718.86,3328.74 3729.62,3339.5 C4.1 3804.5,3330 U2.4 3920.08,3329.43 3914.23,3323.58 3914.23,3297.87 3921.31,3290.8 3928.37,3290.8 3944.18,3275 v3(3955,3275) ; v3(4085,3265) 4334,3265 4388.5,3210.5 R10.1
  Bottom Layer w10: v3(3955,3275) 3960,3270 4080,3270 v3(4085,3265)
NetC4_2: C4.2 U2.2 | length 133.2
  Top Layer w10: C4.2 3801.5,3410.5 3821,3430 U2.2
NetC10_1: C10.1 R16.2 R20.1 U6.1 | length 669.8
  Top Layer w10: C10.1 5055,3795 R16.2@5059.5,3799.5 ; v1(5080,3770) 5076.5,3773.5 5076.5,3782.5 R16.2@5059.5,3799.5 ; U6.1 5086.1,3887.1 5059.5,3860.5 R16.2 R16.2@5059.5,3799.5 ; v1(5195.06,3766) 5195.06,3735.94 5228,3703 5325.72,3703 5328.72,3706 R20.1
  Bottom Layer w10: v1(5080,3770) 5082,3768 5193.06,3768 v1(5195.06,3766)
NetC10_2: C10.2 C13.2 R19.2 R22.2 | length 437.9
  Top Layer w10: C10.2 5056.64,3648.86 5092.64,3648.86 5092.86,3648.64 5121.14,3648.64 5124,3651.5 5174,3651.5 5279.5,3546 R22.2 5285,3449.5 R19.2
NetC11_1: C11.1 R17.2 R21.1 R24.2 U6.7 | length 380.1
  Top Layer w10: U6.7 5204.56,3943.96 5204.56,3913.16 5224.72,3893 5258,3893 R24.2 5279.14,3880.14 5312.64,3880.14 5317.36,3884.86 5339.64,3884.86 5348.5,3876 R17.2 ; R21.1 5408.5,3940.5 5391.5,3923.5 5391.5,3917 5378.5,3904 5378.5,3893 5361.5,3876 R17.2 ; C11.1 5365,3866 R17.2
NetC11_2: C11.2 C14.2 R20.2 R23.2 | length 236.8
  Top Layer w10: R23.2 5495,3871.5 C11.2 C14.2 R20.2
NetC12_2: C12.2 C15.2 R21.2 R25.2 | length 311
  Top Layer w10: R21.2 C15.2 5421.5,4090.5 5471.5,4140.5 5471.5,4144.5 5488.5,4161.5 5501.5,4161.5 5552.39,4110.61 5552.39,4098.5 5569.39,4081.5 R25.2
NetC13_1: C13.1 R16.1 U6.2 | length 232.7
  Top Layer w10: U6.2 5105.44,3943.96 5105.44,3896.9 5105,3896.45 5105,3886 5130.5,3860.5 R16.1 C13.1
NetC14_1: C14.1 R17.1 U6.6 | length 337
  Top Layer w10: U6.6 5184.53,3899.1 5240.63,3843 5310.5,3843 5348.5,3805 R17.1 5361.5,3805 5380.5,3786 C14.1
NetC15_1: C15.1 R18.1 U6.11 | length 369.6
  Top Layer w10: U6.11 5184.87,4108.04 5184.87,4151.64 5229.23,4196 5271.77,4196 5305.27,4162.5 5405,4162.5 C15.1@5409.5,4167 ; R18.1 C15.1@5409.5,4167 ; C15.1 C15.1@5409.5,4167
NetC18_1: C18.1 U8.1 | length 554.2
  Top Layer w10: U8.1 4574.53,4119.47 4577,4121.94 4577,4188.06 4574.53,4190.53 4574.53,4308.88 4602.15,4336.5 4804.5,4336.5 4849.5,4291.5 C18.1
NetC19_1: C19.1 U8.14 | length 98.8
  Top Layer w10: U8.14 4637.34,4005.16 4658.5,3984 C19.1 C19.1@4648.5,4000.5
NetC21_1: C21.1 U8.4 | length 87.7
  Top Layer w10: U8.4@4515.47,4079.14 4515.47,4119.97 4544,4148.5 C21.1
NetC21_2: C21.2 R11.1 R12.1 | length 148.6
  Top Layer w10: C21.2 R11.1 R12.1 R12.1@4689.5,4215
NetC22_2: C22.2 U8.7 U8.8 | length 119
  Top Layer w10: C22.2 4495,3910.5 4495,3985.18 4494.71,3985.47 U8.8 U8.7
NetD3_1: D3.1 D4.2 R1.2 R2.2 U7.4 | length 445.4
  Top Layer w10: U7.4 5073.86,3036.61 5077.42,3033.05 5077.42,3027.46 D3.1 D4.2 5199.5,2805.38 R2.2 5199.5,2748.5 5182.5,2731.5 5178,2731.5 5141.5,2695 R1.2
NetD6_1: D6.1 D7.2 R3.1 R4.2 U7.1 | length 839.4
  Top Layer w10: U7.1 5056.75,3111.91 5088.09,3111.91 5205,2995 5281.77,2995 5311.77,3025 5395,3025 5462.47,2957.53 5482.71,2957.53 D7.2 5495.24,2849.88 D6.1 5460.5,2805.38 R3.1 5477.5,2738 5477.5,2716 5508.5,2685 R4.2
NetJ3_3: J3.3 L1.1 | length 371.8
  Top Layer w10: J3.3 5130,2321.57 L1.1
NetJ3_4: J3.4 L2.1 | length 361.8
  Top Layer w10: L2.1 5530,2311.57 J3.4
NetQ1_1: Q1.1 R6.2 | length 203.4
  Top Layer w20: Q1.1 3919.13,2455.24 3928.82,2445.55 3928.82,2395.68 4008.5,2316 R6.2@4015,2316
NetQ2_1: Q2.1 R7.1 | length 458.2
  Top Layer w20: Q2.1 3883.31,2815.24 3803.62,2894.92 3803.62,3039.3 3873.82,3109.5 R7.1
NetQ3_1: Q3.1 R8.2 | length 139.7
  Top Layer w20: Q3.1 4485,2454.21 R8.2
NetQ4_1: Q4.1 R9.1 | length 768.8
  Top Layer w20: Q4.1 4494.65,2805.24 4538.5,2761.38 4701.79,2761.38 4723.5,2783.09 4723.5,2946.91 4530.91,3139.5 R9.1
NetR13_1: R13.1 R14.2 U6.14 | length 302.1
  Top Layer w10: U6.14 5125.82,4107.35 5125.82,4076.55 5140.87,4061.5 5285,4061.5 R13.1 5301.5,4051.5 5333.5,4083.5 5333.5,4099 R14.2
NetR15_2: R15.2 U7.3 | length 468.5
  Top Layer w10: U7.3 5010.75,3062.2 4998.75,3074.2 4998.75,3331.1 5032.65,3365 R15.2
NetR15_3: R15.3 U7.2 | length 301.3
  Top Layer w10: U7.2 5032.52,3087.8 5026.79,3093.53 5026.38,3093.53 5014.75,3105.16 5014.75,3220.12 5059.63,3265 R15.3
NetR19_1: R19.1 U7.7 | length 276.3
  Top Layer w10: U7.7 5215.07,3087.45 5257.45,3087.45 5284,3114 5284,3202.75 5285,3203.75 R19.1
NetR24_1: R24.1 R27.2 U6.5 | length 265.1
  Top Layer w10: U6.5 5165.19,3943.96 5165.19,3895.81 5239.64,3821.36 5258.64,3821.36 R24.1 R27.2
NetR26_1: R26.1 R28.2 U6.12 | length 198.3
  Top Layer w10: U6.12 5164.84,4165.8 5180.5,4181.46 R28.2 R26.1
NetR29_1: R29.1 R30.2 U8.13 | length 249.4
  Top Layer w10: U8.13 4605.9,3985.47 4620.34,3971.04 4620.34,3963.31 4625.5,3958.15 4625.5,3957.44 4632.94,3950 4704.5,3950 4738.5,3984 R29.1 R30.2
NetR31_2: R31.2 U8.6 | length 196.3
  Top Layer w10: R31.2 4464.03,4129.5 4447.03,4112.5 4447.03,4073.8 4424,4050.77 4424,4029.23 4439.23,4014 4460.77,4014 4471.32,4024.55 4491.44,4024.55 U8.6
NetU3_4: U3.4 U4.5 | length 146.8
  Top Layer w10: U3.4 4373.82,3624.69 4356.91,3607.78 4356.91,3563.27 4375.33,3544.85 4375.33,3515.43 4376.24,3514.53 U4.5
Piezo_Matched+: D1.2 D2.1 L1.2 R1.1 | length 541
  Top Layer w10: L1.2 R1.1
  Top Layer w25: D2.1 4820.12,2625 D1.2@4820.12,2565 ; D1.2 D1.2@4820.12,2565 ; L1.2 5093.43,2565 D1.2@4820.12,2565
Piezo_Matched-: D5.1 D8.2 L2.2 R4.1 | length 1084.5
  Top Layer w10: R4.1 5525,2604 L2.2
  Top Layer w25: D8.2 4785.12,2910 4785.12,2810 D5.1 4930.12,2655 v1(5035,2655) ; v1(5225,2655) 5305,2655 5400.02,2559.98 5478.44,2559.98 L2.2
  Bottom Layer w25: v1(5035,2655) v1(5225,2655)
Rx_Out+: J1.3 U8.11 | length 752.1
  Top Layer w10: J1.3 4185.69,3771 4521,3771 4554.84,3804.84 U8.11
Rx_Out-: J1.4 U8.10 | length 622
  Top Layer w10: J1.4 4268.12,3787 4514.37,3787 4538.84,3811.47 4538.84,3947.47 4535.16,3951.15 U8.10
Teensy_Tx: J1.2 U3.2 U4.1 | length 1166.2
  Top Layer w10: J1.2 3937.36,3827.36 3900,3790 3900,3700 4040,3560 v1(4330,3560) ; U3.2 4465.43,3604.09 4450.46,3604.09 4440.59,3594.22 4440.59,3576.41 4447.59,3569.41 4454.71,3569.41 v1(4476.76,3547.36) ; v1(4510,3420) 4510,3454.57 4510.91,3455.47 U4.1
  Bottom Layer w10: v1(4330,3560) 4458.13,3560 4466.95,3551.18 4472.94,3551.18 v1(4476.76,3547.36) 4472.94,3543.53 4472.94,3518.12 4470,3515.18 4470,3502.63 4510,3462.63 v1(4510,3420)
Teensy_Tx_En: J1.1 U4.2 U4.6 | length 1094.3
  Top Layer w10: J1.1 3838.94,3834.46 3880,3793.39 3880,3690 4030,3540 4299.81,3540 4323.16,3516.65 v1(4325.96,3516.65) ; U4.6 4388.98,3495.75 4407.88,3495.75 4430,3517.87 v1(4430,3520) ; v3(4469.89,3437.78) 4469.89,3443.44 4500.7,3474.25 4521.02,3474.25 U4.2
  Bottom Layer w10: v1(4325.96,3516.65) 4327.63,3518.32 4428.32,3518.32 v1(4430,3520) 4469.89,3480.11 v3(4469.89,3437.78)
Tx_Fwd: U1.5 U2.6 U4.7 | length 2205
  Top Layer w10: U1.5 4072.97,2000 4026.02,2046.95 4026.02,2169.45 4058.5,2201.92 4058.5,2376.45 3945.03,2489.92 3933.77,2489.92 3823.11,2600.58 3823.11,2668.95 3883.31,2729.14 3899.14,2729.14 3959.33,2789.34 3959.33,2841.13 3911.32,2889.14 3900.06,2889.14 3828.62,2960.58 3828.62,3028.95 3872.18,3072.5 3989.71,3072.5 4015,3097.79 4015,3322.03 4072.97,3380 U2.6 4216.57,3380 4311.73,3475.16 U4.7
Tx_Hi_L_Gate: R6.1 U1.3 | length 256
  Top Layer w10: U1.3 3957.03,2050 4006.02,2099 4006.02,2177.73 4015,2186.7 R6.1@4015,2245
Tx_Hi_R_Gate: R7.2 U2.3 | length 270.5
  Top Layer w10: U2.3 3960,3380 3995,3345 3995,3258.43 3957.03,3220.46 3957.03,3182.53 R7.2
Tx_Lo_L_Gate: R8.1 U1.8 | length 414.4
  Top Layer w10: U1.8 4383.5,2150 4478.5,2245 R8.1
Tx_Lo_R_Gate: R9.2 U2.8 | length 483.2
  Top Layer w10: U2.8 4210,3480 v1(4235,3455) ; v1(4315,3375) 4322.65,3367.35 4322.65,3356.35 4468.5,3210.5 R9.2
  Bottom Layer w10: v1(4235,3455) v1(4315,3375)
Tx_Out+: D1.1 D2.2 Q1.3 Q3.2 R5.2 | length 1606
  Top Layer w10: R5.2 4470.5,2001.5 4709.88,2240.88 D1.1
  Top Layer w20: Q1.3 4110.75,2634.76 Q3.2 D1.1 4709.88,2625 D2.2
Tx_Out-: D5.2 D8.1 Q2.3 Q4.2 R10.2 | length 1310.5
  Top Layer w10: R10.2 4401.5,3139.5 4512.94,3028.06 4566.82,3028.06 D8.1
  Top Layer w20: Q2.3 4090.75,2994.76 Q4.2 4659.88,2895 D8.1@4674.88,2910 ; D5.2 4674.88,2810 D8.1@4674.88,2910 ; D8.1 D8.1@4674.88,2910
Tx_Rev: U1.6 U2.5 U4.3 | length 2263.8
  Top Layer w10: U1.6 4072.97,2050 4046.02,2076.95 4046.02,2161.16 4078.5,2193.64 4078.5,2384.74 3953.32,2509.92 3942.05,2509.92 3843.11,2608.87 3843.11,2660.66 3891.59,2709.14 3907.42,2709.14 3979.33,2781.05 3979.33,2849.42 3919.61,2909.14 3908.35,2909.14 3848.62,2968.87 3848.62,3020.66 3880.46,3052.5 3998,3052.5 4035,3089.5 4035,3313.75 4051.25,3330 U2.5 4213.43,3330 4322,3438.57 4430.97,3438.57 4487.24,3494.84 U4.3
V5+: C5.2 C6.1 C7.2 C8.1 C9.2 J2.2 R13.2 U3.5 U4.8 U6.4 U7.8 U8.15 | length 4065.9
  Top Layer w10: U3.5 U3.5@4393.5,3585.32 ; U4.8 4388.98,3456.38 4409.3,3456.38 4435,3482.08 4435.32,3482.08 4458.5,3505.27 4458.5,3524.73 4456,3527.23 4456,3530.77 4429.18,3557.59 4421.23,3557.59 U3.5@4393.5,3585.32 ; 4490,3750 4493.79,3746.21 4493.79,3641.59 ; U8.15 4629.1,4024.84 4631.94,4022 4778.06,4022 4780.9,4024.84 4825.86,4024.84 C8.1@4885,3965.7 ; C5.2 4600.5,3581.5 4540.41,3641.59 4493.79,3641.59 ; U6.4 5145.5,3944.65 5145.5,3980.09 5156.34,3990.93 5156.34,3999.25 5156.92,3999.84 v1@5160.16,3999.84 ; U3.5@4393.5,3585.32 4401.56,3593.37 4401.56,3595.97 4447.18,3641.59 4493.79,3641.59
  Top Layer w12: C7.2 5379.5,3231.5 5395.5,3247.5 5405.26,3247.5 5415,3257.24 5415,3340
  Top Layer w20: J2.2 3725.91,3750 v1(3850,3750) ; v1(3930,3750) 4490,3750 4750,3750 4885,3885 C8.1 ; C8.1@4885,3965.7 C8.1 ; v1(5050,3990) 5048.65,3990 5038.15,3979.5 C9.2 4978.5,3979.5 4963.76,3964.76 C8.1 ; v1(5160.16,4008.49) 5206.18,4008.49 5215.16,3999.5 5260.01,3999.5 5267.01,3992.5 5283,3992.5 R13.2 5301.5,3980.5 5350,3932 v1(5350,3930) ; U7.8@5234.25,3114.53 5248.09,3128.36 5248.09,3138.09 v1(5250,3140) ; v1(5330,3140) 5332.71,3140 5342.71,3130 C6.1@5399.76,3130 ; v1(5350,3670) 5415,3605 5415,3340 ; C7.2 5379.5,3150.26 C6.1@5399.76,3130 ; C6.1 C6.1@5399.76,3130
  Bottom Layer w20: v1(3850,3750) v1(3930,3750) ; v1(5050,3990) 5105.16,3990 5121.74,4006.58 5158.25,4006.58 v1(5160.16,4008.49) ; v1(5250,3140) v1(5330,3140) ; v1(5350,3670) v1(5350,3930)
VRef+: C20.2 D3.2 D4.1 D6.2 D7.1 R2.1 R3.2 R11.2 R22.1 R23.1 R25.1 R27.1 R28.1 U6.3 U6.15 U6.16 U7.6 | length 2450.7
  Top Layer w10: R11.2 5084.2,4155 5086.1,4156.9 ; U6.15 U6.16 ; R28.1@5105.79,4232.29 5105.79,4225.79 5086.1,4206.1 5086.1,4156.9 ; 5123.23,4018.22 5139.5,4034.49 5247.37,4034.49 5262.36,4019.5 5322.06,4019.5 5363.06,3978.5 5455.5,3978.5 5488.5,4011.5 R23.1 5574,4011.5 R25.1 ; U7.6 5216.16,3060.77 v1(5319.41,3060.77) 5319.41,3064.71 5300,3084.13 5300,3170 5333.5,3203.5 5333.5,3295 ; C20.2 5333.5,3295 ; D6.2@5389.5,2845 D6.2@5389.5,2854.62 ; D6.2 5389.88,2854.24 D6.2@5389.5,2854.62 ; D6.2@5389.88,2855 D6.2@5389.5,2854.62 ; U6.16 5086.1,4055.35 5125.47,4015.98 U6.3 5125.47,3888.15 5169.06,3844.57 5169.06,3720.94 5237.36,3652.64 5262.64,3652.64 R27.1 5281.5,3665 5333.5,3613 5333.5,3472 R22.1 5333.5,3438 5333.5,3295 ; U6.16 5086.1,4156.9
  Bottom Layer w10: v1@5319.41,2994.65 v1(5319.41,3060.77)
  other v1: 5325,2985
VTx+: C1.2 C3.2 J2.1 Q1.2 Q2.2 U1.1 U2.1 | length 2348
  Top Layer w10: C1.2 3770,2150 U1.1 ; C3.2@3790.5,3498.5 3809,3480 U2.1
  Top Layer w25: J2.1 3790.5,3586.98 3790.5,3498.5 3645,3353 3645,3125 3615,3095 3615,2910.51 Q2.2
  Top Layer w50: Q2.2 3615,2899.49 Q1.2 3615,2358.78 3762,2211.78 3762,2148 C1.2
pads on no net: J1.SH J2.SH R15.1 U3.1 U8.2 U8.3 U8.9 U8.12

## Polygon pours and split planes (outlines as drawn)
VRef+ on Top Layer "VREF+_L01_P004" (solid, pour order 4): 5245,2975 5275,3005 5385,3005 5415,2975 5415,2725 5395,2705 5265,2705 5245,2725
GND on Top Layer "GND_L01_P010" (solid, pour order 10): 5430,3325 5425,3320 5425,3195 5465,3155 5465,3085 5545,3085 5545,3165 5475,3235 5475,3320 5470,3325
GND on Bottom Layer "GND_L02_P008" (solid, pour order 8): 4880,1880 4880,3520 4820,3580 4500,3580 4380,3700 3440,3700 3380,3640 3380,1940 3440,1880
GND on Bottom Layer "GND_L02_P006" (solid, pour order 6): 5060,1880 5000,1940 5000,3600 4900,3700 4520,3700 4420,3800 4420,4300 4500,4380 5620,4380 5660,4340 5660,1940 5600,1880
GND on Bottom Layer "GND_L02_P009" (solid, pour order 9): 4340,3860 4380,3900 4380,4320 4320,4380 3460,4380 3380,4300 3380,3920 3440,3860

## Other copper
Top Layer:
  text "Gleb Ryabtsev" at 3860,1749.43 h100
Bottom Layer:
  pour cut-out: 4010,1800 4070,1740 4010,1740

## Silkscreen, mask and mechanical layers (free items; w line width, h text height)
Top Overlay:
  lines w10: 5360,4160 5360,4270
  text "Rev. A" at 5819.03,3920 h80 r90
  text "Spring '23" at 5894.45,3920 h80 r90
  text "d" at 4630,3360 h300
  text "A" at 4550,3030 h300
  text "2" at 4590,2210 h250
  text "TartanAUV" at 5830,1910 h150 r90
  text "k" at 5990,1732.91 h150 r90
Top Solder:
  text "Gleb Ryabtsev" at 3860,1749.43 h100